# EAGLE board schematic (EAGLE 7.7.0)
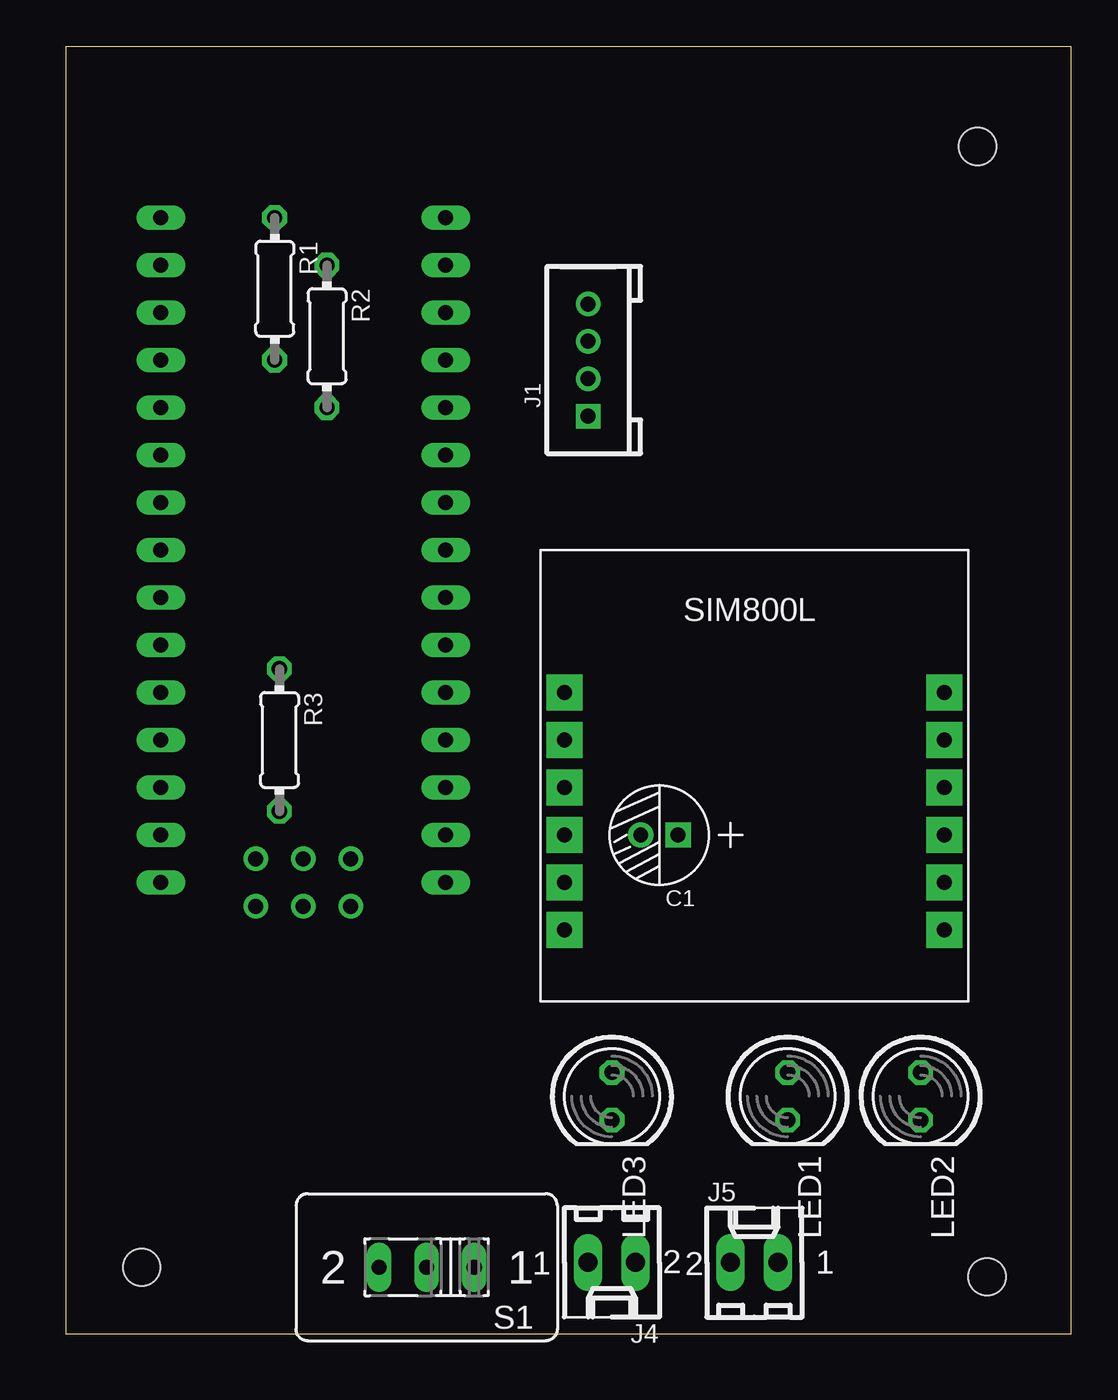
[diagram p0: board, top side]
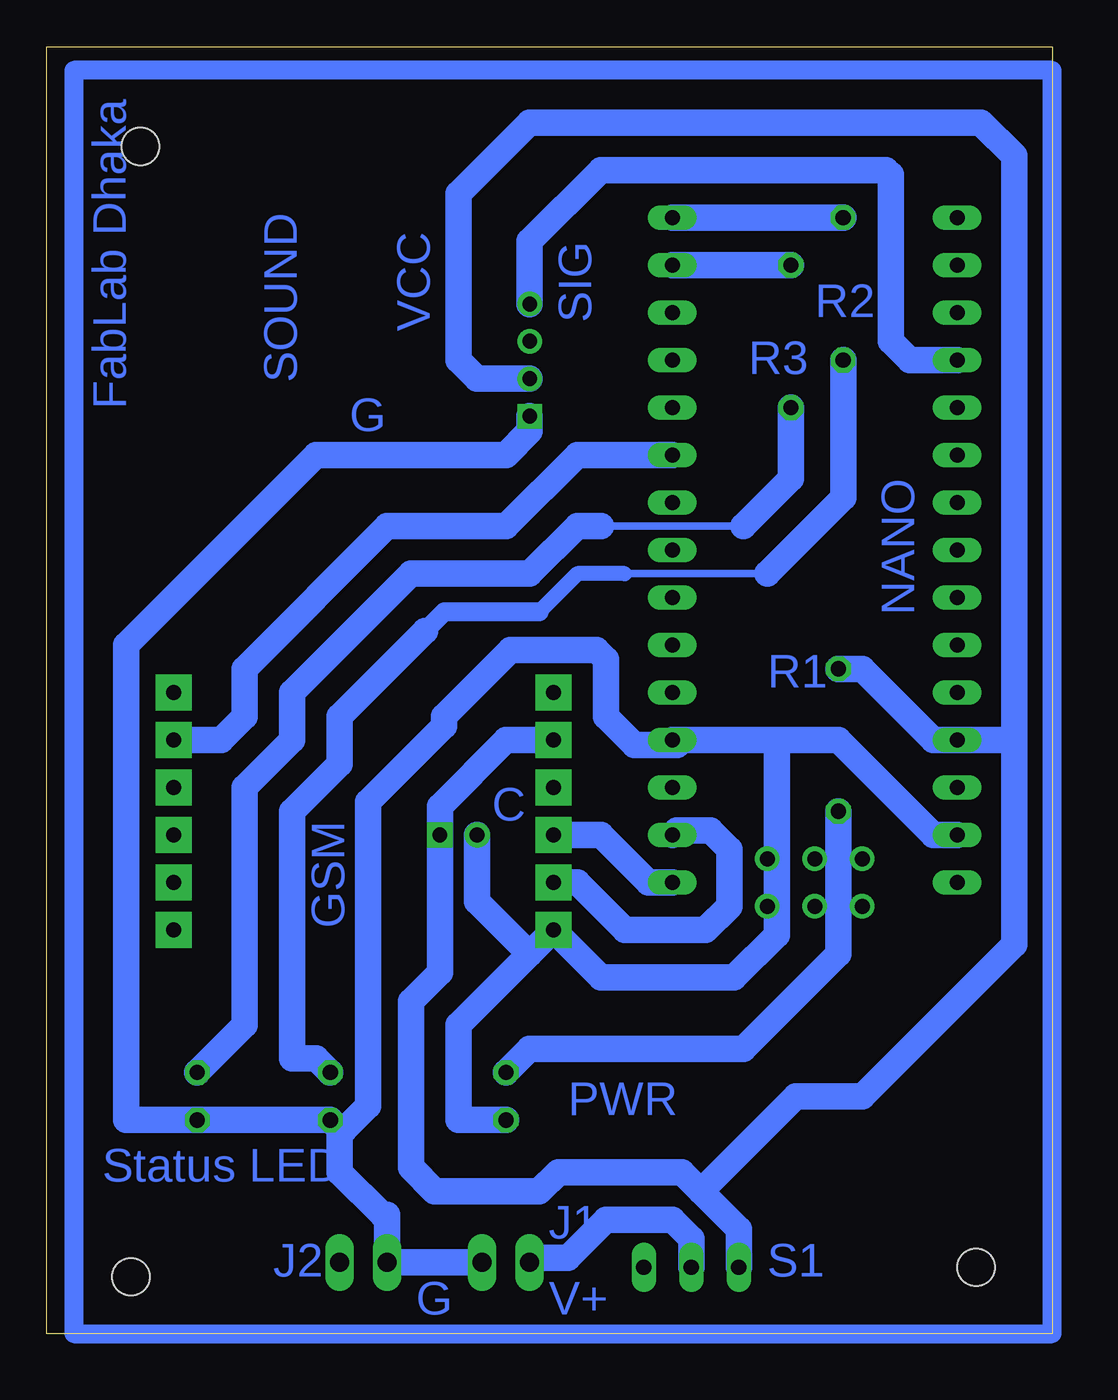
[diagram p1: board, bottom side, seen from below]

Size 53.77 x 68.82 mm. Coordinates in mm from the lower left corner, seen from the top.
Outline: 0,0 53.77,0 53.77,68.82 0,68.82 0,0
Copper layers (1*16): Top 0.035mm / dielectric 1.5mm / Bottom 0.035mm
Design rules "default *": minimum track width 10mil, minimum drill 24mil, track to track 8mil, track to pad 8mil, pad to pad 8mil, via to via 8mil, smd to smd 8mil, copper to edge 40mil, drill to drill 8mil, minimum pad ring 10mil, minimum via ring 8mil, stop-mask expansion 4mil, vias tented up to drill 0mil, thermal gap 10mil
Holes 2 mm at 4.06,3.56 48.77,63.5 49.28,3.05

## Footprints (pad centres in the part's own frame; a part is rotated, then mirrored left to right if it is on the bottom)
PC-D5.3MM = drill 0.8 pad 1.35 square: + -1,0 | drill 0.8 pad 1.35: - 1,0
HW4-2.0 = drill 0.8 pad 1.27 square: 1 -3,0 | drill 0.8 pad 1.27: 2 -1,0; 3 1,0; 4 3,0
6410-02 = drill 1.016 long: 1 1.27,0; 2 -1.27,0
LED5MM = drill 0.813 octagon: A -1.27,0; K 1.27,0
0204/7 = drill 0.813 octagon: 1 -3.81,0; 2 3.81,0
M251 = drill 0.813 long: 1 -2.54,0; 2 0,0; 3 2.54,0
NANO = drill 0.8 long: 3.3V -10.16,24.13; 5V -10.16,-1.27; A0 -10.16,19.05; A1 -10.16,16.51; A2 -10.16,13.97; A3 -10.16,11.43; A4 -10.16,8.89; A5 -10.16,6.35; A6 -10.16,3.81; A7 -10.16,1.27; AREF -10.16,21.59; D2 5.08,1.27; D3 5.08,3.81; D4 5.08,6.35; D5 5.08,8.89; D6 5.08,11.43; D7 5.08,13.97; D8 5.08,16.51; D9 5.08,19.05; D10 5.08,21.59; D11 5.08,24.13; D12 5.08,26.67; D13 -10.16,26.67; GND -10.16,-6.35; GND1 5.08,-1.27; RAW -10.16,-8.89; RST -10.16,-3.81; RST1 5.08,-3.81; RX1 5.08,-6.35; TX0 5.08,-8.89 | drill 0.8: ICSP1 -5.08,-10.16; ICSP2 -5.08,-7.62; ICSP3 -2.54,-10.16; ICSP4 -2.54,-7.62; ICSP5 0,-10.16; ICSP6 0,-7.62
SIM-CORE = drill 0.8 pad 1.93 square: DTR 21.59,13.97; GND 1.27,3.81; MCN 21.59,8.89; MCP 21.59,11.43; NET 1.27,16.51; RNG 21.59,16.51; RST 1.27,11.43; RXD 1.27,8.89; SPKN 21.59,3.81; SPKP 21.59,6.35; TXD 1.27,6.35; VCC 1.27,13.97

## Placement (x,y rotation side)
C1  100uf  [PC-D5.3MM]  31.75,26.67 180 top
J1  4P-2.0  [HW4-2.0]  27.94,52.07 90 top
J4  22-27-2021-02  [6410-02]  29.21,3.81 180 top
J5  22-27-2021-02  [6410-02]  36.83,3.81 0 top
LED1  [LED5MM]  38.61,12.7 270 top
LED2  [LED5MM]  45.72,12.7 270 top
LED3  [LED5MM]  29.21,12.7 270 top
R1  [0204/7]  11.18,55.88 270 top
R2  [0204/7]  13.97,53.34 270 top
R3  [0204/7]  11.43,31.75 270 top
S1  [M251]  19.3,3.56 180 top
U$1  NANO  [NANO]  15.24,33.02 0 top
U$2  SIM800L  [SIM-CORE]  25.4,17.78 0 top

## Library data of the parts
C1 = Seeed-Capacitor-2016; MPN: KS 100uF/16V
J1 = Seeed-Connector -2016
J4 J5 = con-molex; MF: MOLEX; OC_FARNELL: unknown; OC_NEWARK: unknown
LED1-LED3 = led
R1-R3 = resistor
S1 = switch
U$1 = Arduino-clone
U$2 = simcom

## Nets
DT: U$1.D7 U$2.DTR
GND: C1.- J1.1 J4.2 J5.2 LED1.K LED2.K LED3.K U$1.GND U$1.GND1 U$2.GND
N$1: U$1.TX0 U$2.RXD
N$2: U$1.RX1 U$2.TXD
N$3: R1.1 U$1.D12
N$4: R2.1 U$1.D11
N$5: LED1.A R1.2
N$6: LED2.A R2.2
N$8: LED3.A R3.2
N$9: J4.1 S1.2
SIG: J1.4 U$1.A0
VCC: C1.+ J1.2 R3.1 S1.3 U$1.5V U$2.VCC

## Tracks (layer width: path | path; a pad name or v marks a point on that pad's centre or on a via)
DT
  Bottom 1.422: U$1.D7 25.4,46.99 29.21,43.18 35.56,43.18 43.18,35.56 43.18,33.02 44.45,31.75 U$2.DTR
GND
  Bottom 1.422: U$1.GND 6.35,26.67 11.43,31.75 14.73,31.75 | 19.81,31.75 14.73,31.75 | LED3.K 31.75,11.43 31.75,16.51 27.94,20.32 | J4.2 J5.2 35.56,6.35 35.81,6.35 38.1,8.64 38.1,10.92 | 27.94,20.32 U$2.GND 24.13,19.05 17.02,19.05 14.73,21.34 14.73,31.75 | C1.- 30.75,23.13 27.94,20.32 | U$1.GND1 19.81,31.75 | J1.1 27.94,48.26 29.21,46.99 39.37,46.99 49.53,36.83 49.53,11.43 LED2.K LED1.K 38.1,10.92 | 19.81,31.75 20.07,31.5 22.35,31.5 23.88,33.02 23.88,36.07 24.38,36.58 28.96,36.58 32.51,33.02 32.51,32.51 36.58,28.45 36.58,12.19 37.85,10.92 38.1,10.92
N$1
  Bottom 1.422: U$1.TX0 21.59,24.13 24.13,26.67 U$2.RXD
N$2
  Bottom 1.422: U$2.TXD 25.4,24.13 22.86,21.59 18.54,21.59 17.27,22.86 17.27,25.91 18.29,26.92 20.07,26.92 U$1.RX1
N$3
  Bottom 1.422: U$1.D12 R1.1
N$4
  Bottom 1.422: U$1.D11 R2.1
N$5
  Bottom 0.406: 15.24,40.64 22.86,40.64
  Bottom 0.813: 22.86,40.64 25.4,40.64 27.43,38.61
  Bottom 1.016: 27.43,38.61 32.51,38.61 33.53,37.59
  Bottom 1.422: 33.53,37.59 38.1,33.02 38.1,30.48 40.64,27.94 40.64,14.73 39.37,14.73 LED1.A | R1.2 11.18,44.7 15.24,40.64
N$6
  Bottom 0.406: 16.51,43.18 24.13,43.18
  Bottom 1.422: R2.2 13.97,45.72 16.51,43.18 | LED2.A 43.18,16.51 43.18,29.21 40.64,31.75 40.64,34.29 34.29,40.64 27.94,40.64 25.4,43.18 24.13,43.18
N$7
  Bottom 1.016: 0,0 0,67.56 52.32,67.56 52.32,0 0,0
N$8
  Bottom 1.422: R3.2 11.43,20.32 16.51,15.24 27.94,15.24 LED3.A
N$9
  Bottom 1.422: S1.2 19.3,5.08 20.32,6.1 23.88,6.1 25.91,4.06 27.94,4.06 J4.1
SIG
  Bottom 1.422: J1.4 27.94,58.42 24.13,62.23 8.89,62.23 8.64,61.98 8.64,53.09 7.62,52.07 U$1.A0
VCC
  Bottom 1.422: U$2.VCC 29.21,31.75 32.75,28.21 C1.+ 32.75,19.32 34.29,17.78 34.29,8.89 33.02,7.62 27.43,7.62 26.42,8.64 19.81,8.64 18.8,7.62 | R3.1 10.16,35.56 6.35,31.75 U$1.5V 2.29,31.75 2.03,32 | J1.2 30.75,51.07 31.75,52.07 31.75,60.96 27.94,64.77 3.81,64.77 2.03,62.99 2.03,32 | 2.03,32 2.03,20.83 10.16,12.7 13.72,12.7 18.8,7.62 | 18.8,7.62 16.76,5.59 S1.3

## Text on the board
Bottom: FabLab Dhaka | SOUND | VCC | SIG | R2 | R3 | G | NANO | R1 | C | GSM | PWR | Status LED | J1 | S1 | J2 | V+ | G